# Altium PCB V_2.PcbDoc
Units mil, origin at the board's own origin, x right, y up, seen from the top; angles counter-clockwise.
Board outline 6000 x 4000 mil, 2 copper layers (Top Layer, Bottom Layer); 6 components, 0 nets, 77 pads, 7 vias.
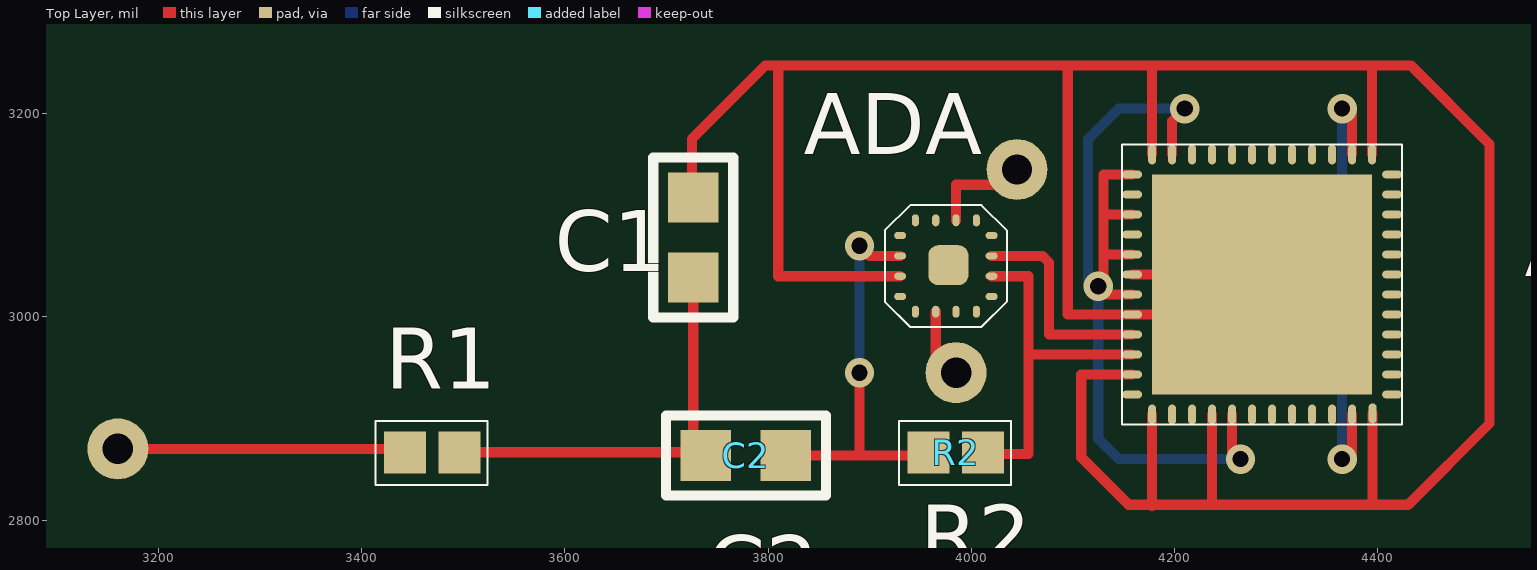
[diagram p0: Top Layer view]
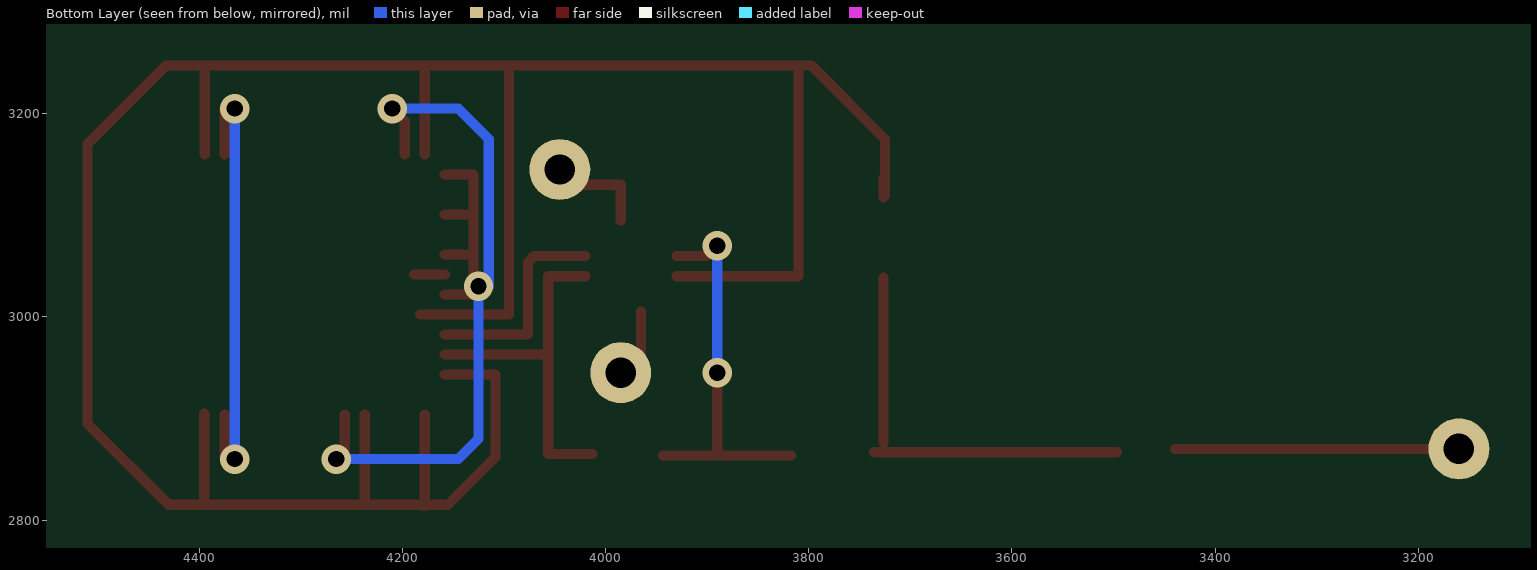
[diagram p1: Bottom Layer view, seen from below]

## Layer stack, top to bottom
Top Layer: signal copper 1.4
Dielectric: dielectric 12.6, FR-4, Dk 4.8
Bottom Layer: signal copper 1.4

## Board outline
1000,1000 7000,1000 7000,5000 1000,5000

## Design rules (kind name [scope] priority, off if disabled: settings)
Clearance [All] p1: gap=10
PolygonConnect [All] p1: connectstyle=Relief reliefconductorwidth=10 reliefentries=4 polygonreliefangle="90 Angle"
RoutingVias [All] p1: holewidth=28 width=50 viastyle="Through Hole" minholewidth=28 minwidth=50 maxholewidth=28 maxwidth=50
SilkscreenOverComponentPads [All] p1: minsilkscreentomaskgap=10
SolderMaskExpansion [All] p1: expansion=4
Width [All] p1: maxlimit=10 minlimit=10 preferedwidth=10
27 further rules are at their usual default settings.

## Components (designator, comment, footprint, x,y, rotation, side; value= is the part's Value field where it differs from the comment)
ADA "Comment" ADA 3990,3045 r0 top
ADC "Comment" ADC 4290,3040 r180 top
C1 "Comment" "Capacitor - duplicate"#1 3725,3075 r90 top
C2 "Comment" "Capacitor - duplicate"#2 3775,2865 r0 top
R1 "Comment" Resistor#1 3470,2865 r0 top
R2 "Comment" Resistor#2 3985,2865 r0 top

## Footprints (in the part's own frame and the unit in brackets; to place one, negate y for a bottom-side part, rotate by r counter-clockwise, add the part's x,y. Pads: shape width x height; smd on the part's side, far side on the other; paste and mask are expansions set on the pad)
ADA [mm]
  rrect50% 1x1 smd: 0(-0.319,0.147)
  oval 0.3x0.18 smd: 1(-1.524,0.889) 2(-1.524,0.381) 3(-1.524,-0.127) 4(-1.524,-0.635) 9(0.762,-0.635) 10(0.762,-0.127) 11(0.762,0.381) 12(0.762,0.889)
  oval 0.18x0.3 smd: 5(-1.143,-1.016) 6(-0.635,-1.016) 7(-0.127,-1.016) 8(0.381,-1.016) 13(0.381,1.27) 14(-0.127,1.27) 15(-0.635,1.27) 16(-1.143,1.27)
  silkscreen extent -1.91,-1.4 1.14,1.65
ADC [mm]
  rect 5.5x5.5 smd: 0(0.096,0.208)
  oval 0.2x0.5 smd: 1(-2.667,3.429) 2(-2.154,3.458) 3(-1.654,3.458) 4(-1.154,3.458) 5(-0.654,3.458) 6(-0.154,3.458) 7(0.346,3.458) 8(0.846,3.458) 9(1.346,3.458) 10(1.846,3.458) 11(2.346,3.458) 12(2.846,3.458) 25(2.846,-3.042) 26(2.346,-3.042) 27(1.846,-3.042) 28(1.346,-3.042) 29(0.846,-3.042) 30(0.346,-3.042) 31(-0.154,-3.042) 32(-0.654,-3.042) 33(-1.154,-3.042) 34(-1.654,-3.042) 35(-2.154,-3.042) 36(-2.654,-3.042)
  oval 0.5x0.2 smd: 13(3.346,2.958) 14(3.346,2.458) 15(3.346,1.958) 16(3.346,1.458) 17(3.346,0.958) 18(3.346,0.458) 19(3.346,-0.042) 20(3.346,-0.542) 21(3.346,-1.042) 22(3.346,-1.542) 23(3.346,-2.042) 24(3.346,-2.542) 37(-3.154,-2.542) 38(-3.154,-2.042) 39(-3.154,-1.542) 40(-3.154,-1.042) 41(-3.154,-0.542) 42(-3.154,-0.042) 43(-3.154,0.458) 44(-3.154,0.958) 45(-3.154,1.458) 46(-3.154,1.958) 47(-3.154,2.458) 48(-3.154,2.958)
  silkscreen extent -3.4,-3.29 3.6,3.71
"Capacitor - duplicate"#1 [mm]
  rect 1.26x1.27 smd: 0(1.079,-0.036) 2(-0.921,-0.036)
  silkscreen extent -1.92,-1.04 2.08,0.96
"Capacitor - duplicate"#2 [mm]
  rect 1.26x1.27 smd: 2(-0.921,-0.036) 3(1.079,-0.036)
  silkscreen extent -1.92,-1.04 2.08,0.96
Resistor#1 [mm]
  rect 1.05x1.05 smd: 0(-0.689,0.042) 2(0.671,0.042)
  silkscreen extent -1.43,-0.77 1.37,0.83
Resistor#2 [mm]
  rect 1.05x1.05 smd: 1(-0.689,0.042) 2(0.671,0.042)
  silkscreen extent -1.43,-0.77 1.37,0.83

## Free pads (board coordinates)
  round 60 hole 30: 0(3160,2870) 1(4045,3145) 2(3985,2945)

## Via types
v1: diameter 29, hole 16, Top Layer to Bottom Layer, 7 vias

## Nets (pads, with @x,y where several pads share a name; then routed paths per layer and width w, separated by ;. In a path a pad name is that pad's centre, name@x,y a point inside that pad or via, vN(x,y) a via of type N, cw(c..) or ccw(c..) an arc to the next point about the centre after c; other vN are vias at no path point)
pads on no net: ADA.0 ADA.1 ADA.2 ADA.3 ADA.4 ADA.5 ADA.6 ADA.7 ADA.8 ADA.9 ADA.10 ADA.11 ADA.12 ADA.13 ADA.14 ADA.15 ADA.16 ADC.0 ADC.1 ADC.2 ADC.3 ADC.4 ADC.5 ADC.6 ADC.7 ADC.8 ADC.9 ADC.10 ADC.11 ADC.12 ADC.13 ADC.14 ADC.15 ADC.16 ADC.17 ADC.18 ADC.19 ADC.20 ADC.21 ADC.22 ADC.23 ADC.24 ADC.25 ADC.26 ADC.27 ADC.28 ADC.29 ADC.30 ADC.31 ADC.32 ADC.33 ADC.34 ADC.35 ADC.36 ADC.37 ADC.38 ADC.39 ADC.40 ADC.41 ADC.42 ADC.43 ADC.44 ADC.45 ADC.46 ADC.47 ADC.48 C1.0 C1.2 C2.2 C2.3 R1.0 R1.2 R2.1 R2.2
copper on no net: | length 5958.9
  Top Layer w10: 3170,2870 3350,2870 3405,2870 3439.54,2870 ; 3496.43,2866.65 3695.87,2866.65 3735.68,2866.65 ; 3725,3118.9 3725,3175 3797.5,3247.5 4137.5,3247.5 ; 3726.42,2875.91 3726.42,2946.42 3726.42,3038.74 ; 3726.42,3117.48 3726.42,3136.42 ; 3810,3245 3810,3200 3810,3175 3810,3040 3930,3040 ; 3817.48,2863.58 3900,2863.58 3941.42,2863.58 3943.58,2863.58 ; 3890,2863.58 v1@3890,2935 ; v1(3890,3070) 3900,3060 3905,3060 3930,3060 ; 3965,2955 3965,2975 3965,3005 ; 3985,3095 3985,3130 4025,3130 ; 4013.08,2865 4056.43,2865 4056.43,2912.23 4056.43,3040 4020,3040 ; 4020,3060 4050,3060 4070,3060 4075,3055 4076.43,3053.57 4076.43,2982.9 ; 4056.43,2962.9 4107.1,2962.9 4158.25,2962.9 ; 4076.75,2982.58 4147.42,2982.58 4158.25,2982.58 ; 4095,3247.5 4095,3002.27 4158.25,3002.27 4182.73,3002.27 ; 4112.5,3247.5 4432.5,3247.5 4510,3170 4510,3101.25 4510,3066.88 4510,2998.12 4510,2963.75 4510,2895 4430,2815 4155,2815 4108.21,2861.79 4108.21,2943.21 4158.25,2943.21 ; v1@4130.06,3025.06 4130.06,3070 4130.06,3140.06 4158.25,3140.06 ; 4130.69,3100.69 4158.25,3100.69 ; 4131.39,3061.32 4141.32,3061.32 4158.25,3061.32 ; v1@4133.17,3021.95 4138.05,3021.95 4158.25,3021.95 ; 4159.25,3041.64 4158.25,3041.64 4188.36,3041.64 ; 4177.94,2820 4177.94,2813.97 4177.94,2903.84 ; 4177.94,3159.75 4177.94,3247.06 ; 4197.62,3159.75 4197.62,3192.62 v1(4210,3205) ; 4236.99,2815 4236.99,2903.84 ; 4256.68,2903.84 4256.68,2868.32 v1(4265,2860) ; v1@4374.79,2860.21 4374.79,2903.84 4374.79,2895.21 ; 4374.79,3159.75 v1@4374.79,3204.79 ; 4394.47,3159.75 4394.47,3245 ; 4395,2815 4395,2905
  Bottom Layer w10: v1@3890,2955 3890,3055 ; v1@4115,3030 4115,3175 4145,3205 v1(4210,3205) v1@4200,3205 ; v1@4125,3025 4125,2880 4145,2860 4225,2860 v1@4260,2860 ; v1@4365,2865 4365,2885 4365,3190 v1(4365,3205)
  other v1: 4365,2860 3890,2945 4125,3030

## Silkscreen, mask and mechanical layers (free items; w line width, h text height)
Top Solder:
  lines w9.84: 4780.32,2625.92 3000.42,2625.92 3000.42,3413.32 4785.32,3413.32 4785.32,2630.33